# Altium PCB 408HR_pcbminions.PcbDoc
Units mil, origin at the board's own origin, x right, y up, seen from the top; angles counter-clockwise.
Board outline 3149.61 x 6299.21 mil, 4 copper layers (Top Layer, Layer 1, Layer 2, Bottom Layer), stack 63.779 mil thick; 23 components, 22 nets, 110 pads, 349 vias.
Unrouted connection lines stored in the file: 8.
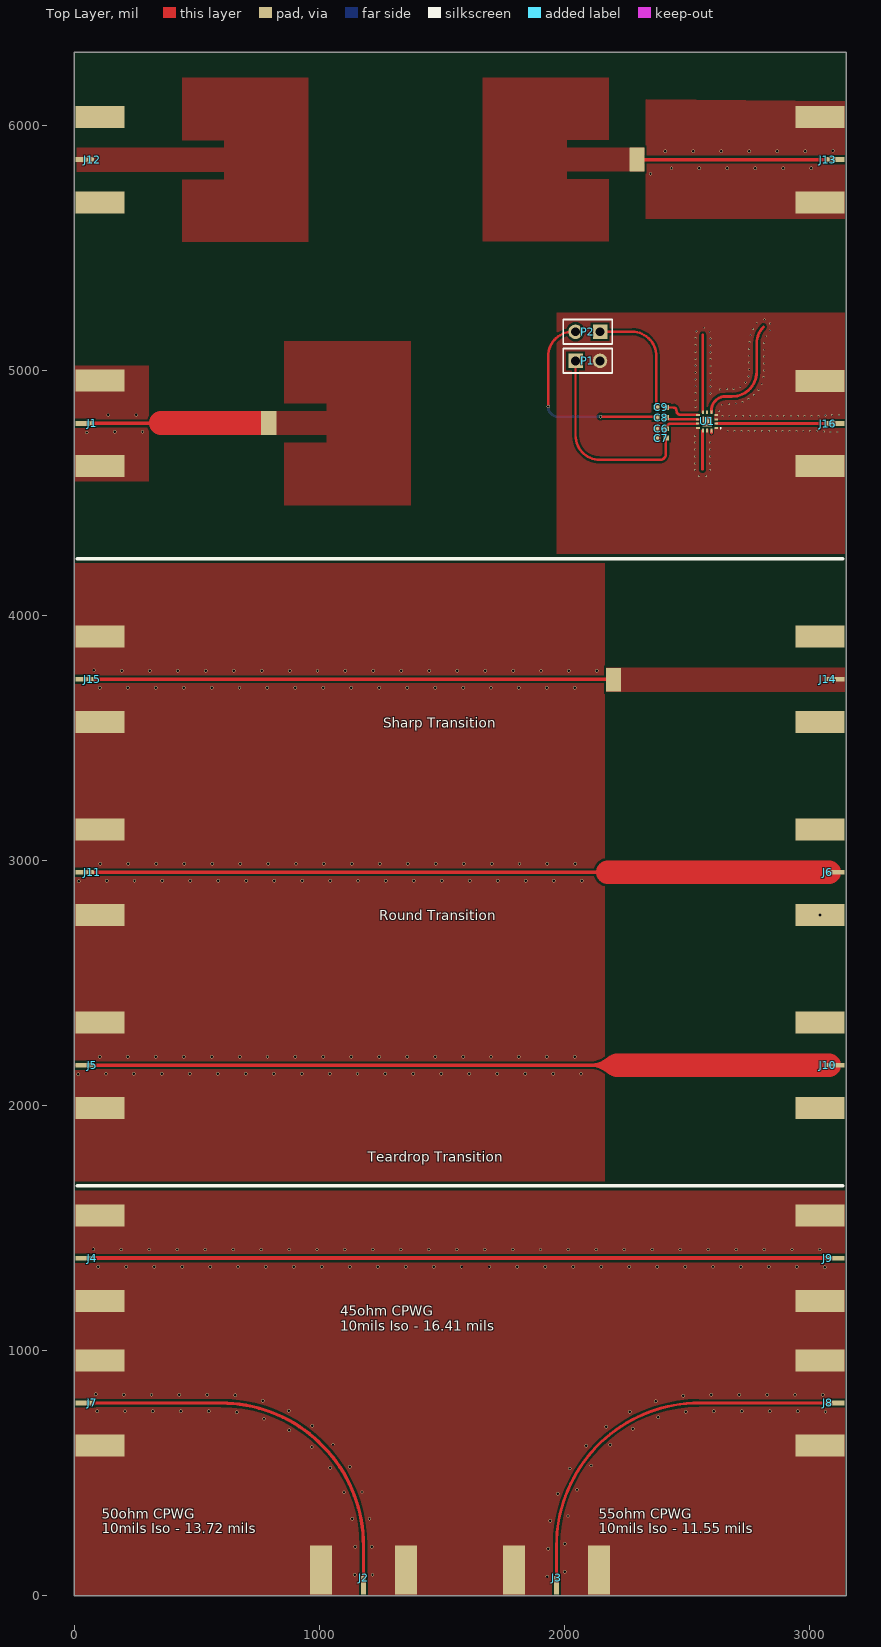
[diagram p0: Top Layer view]
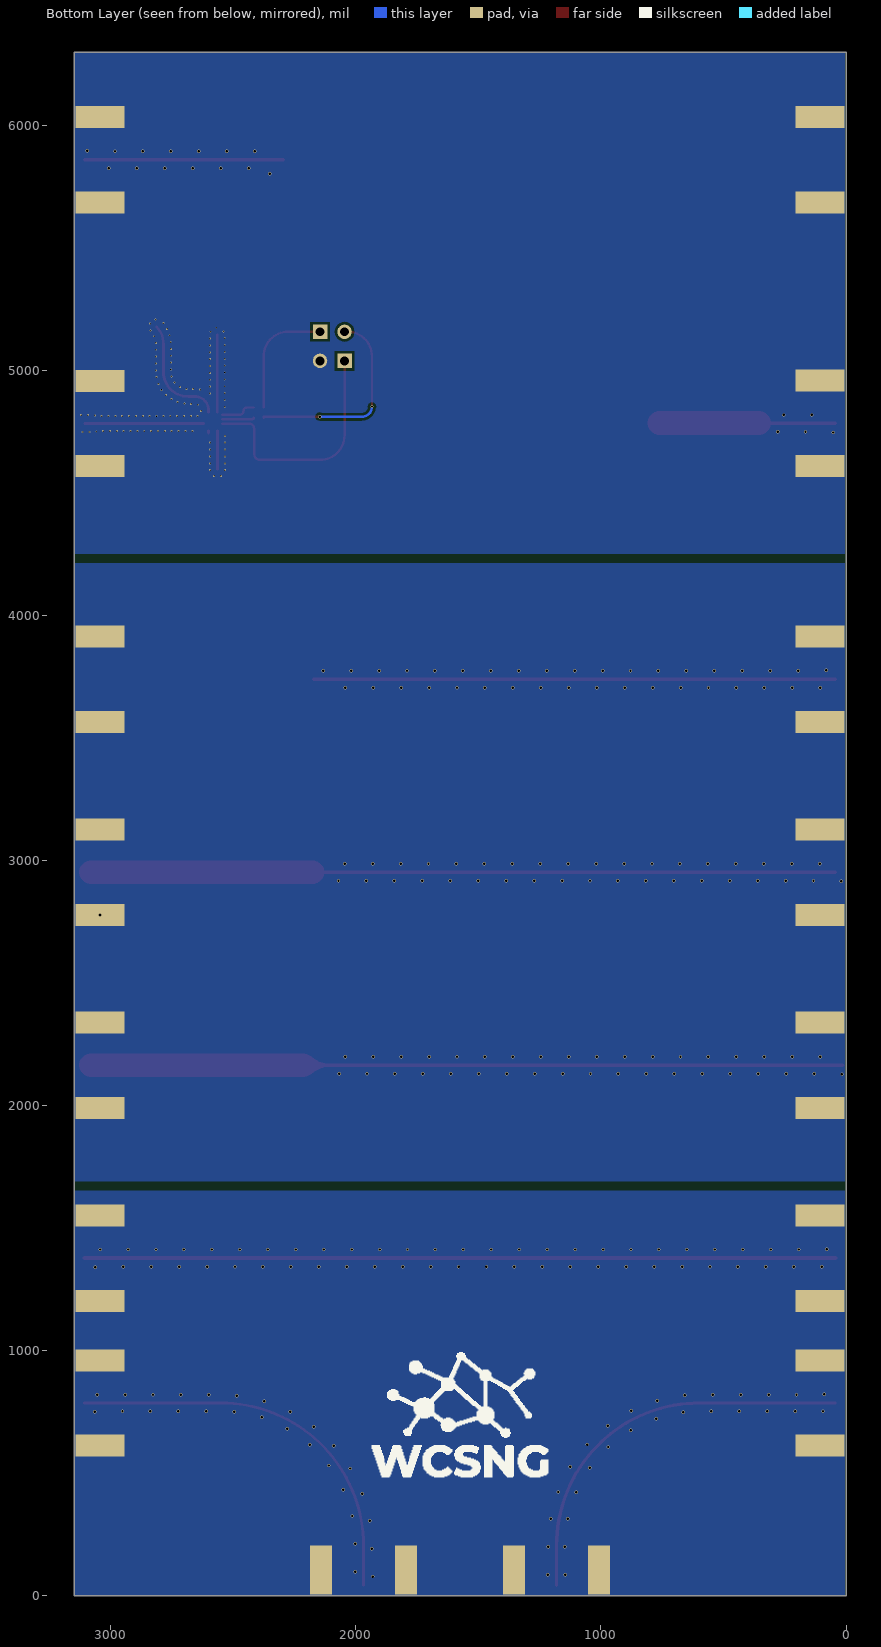
[diagram p1: Bottom Layer view, seen from below]
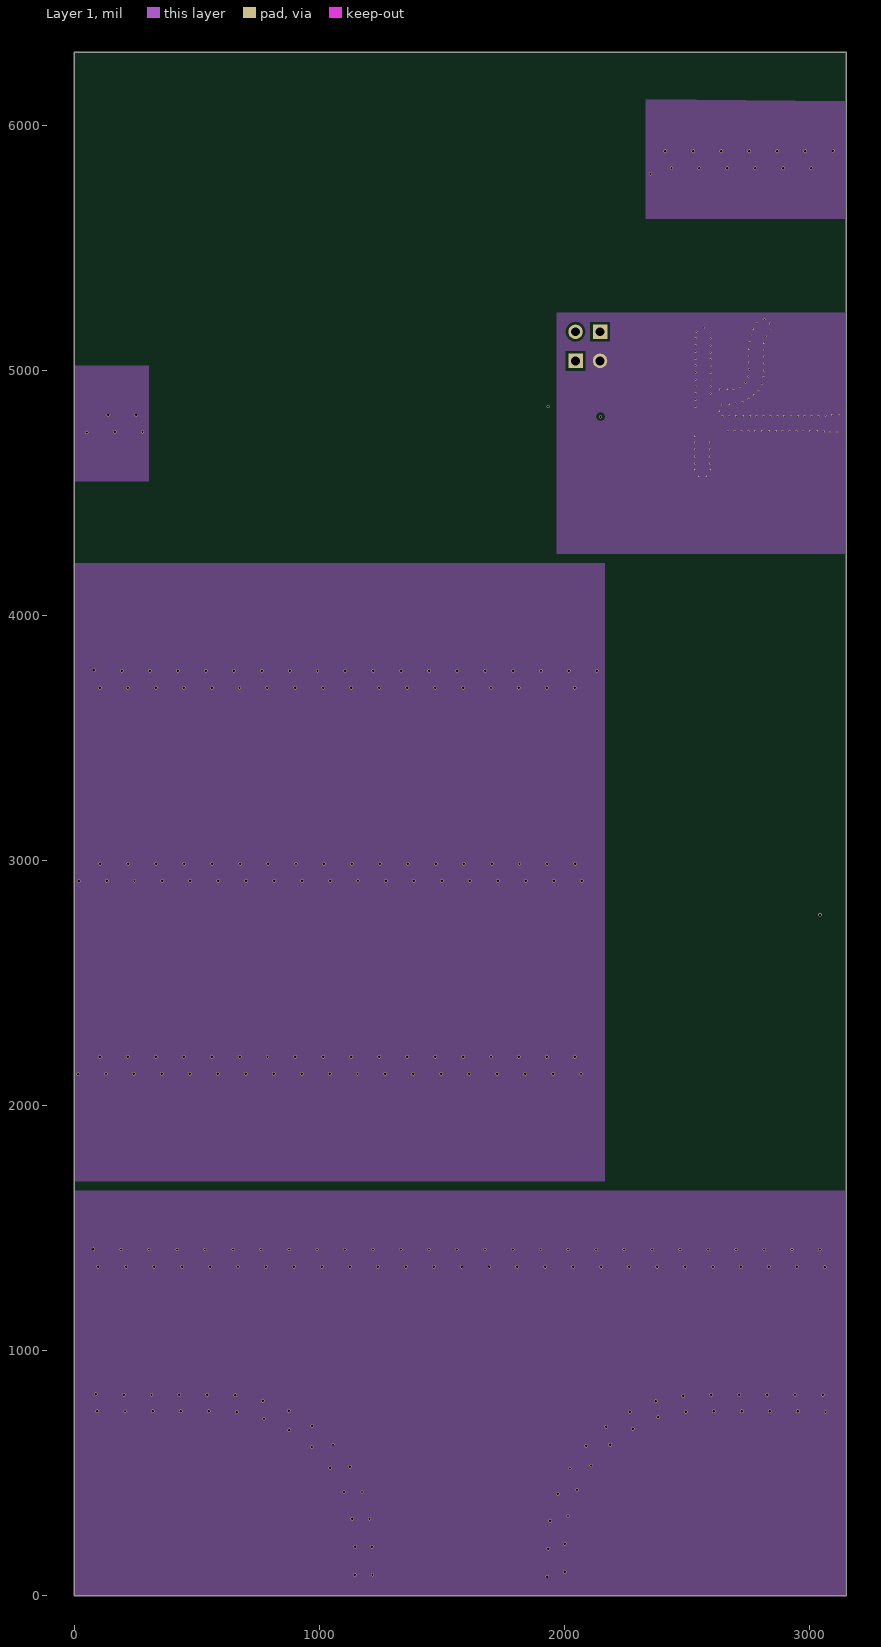
[diagram p2: Layer 1]
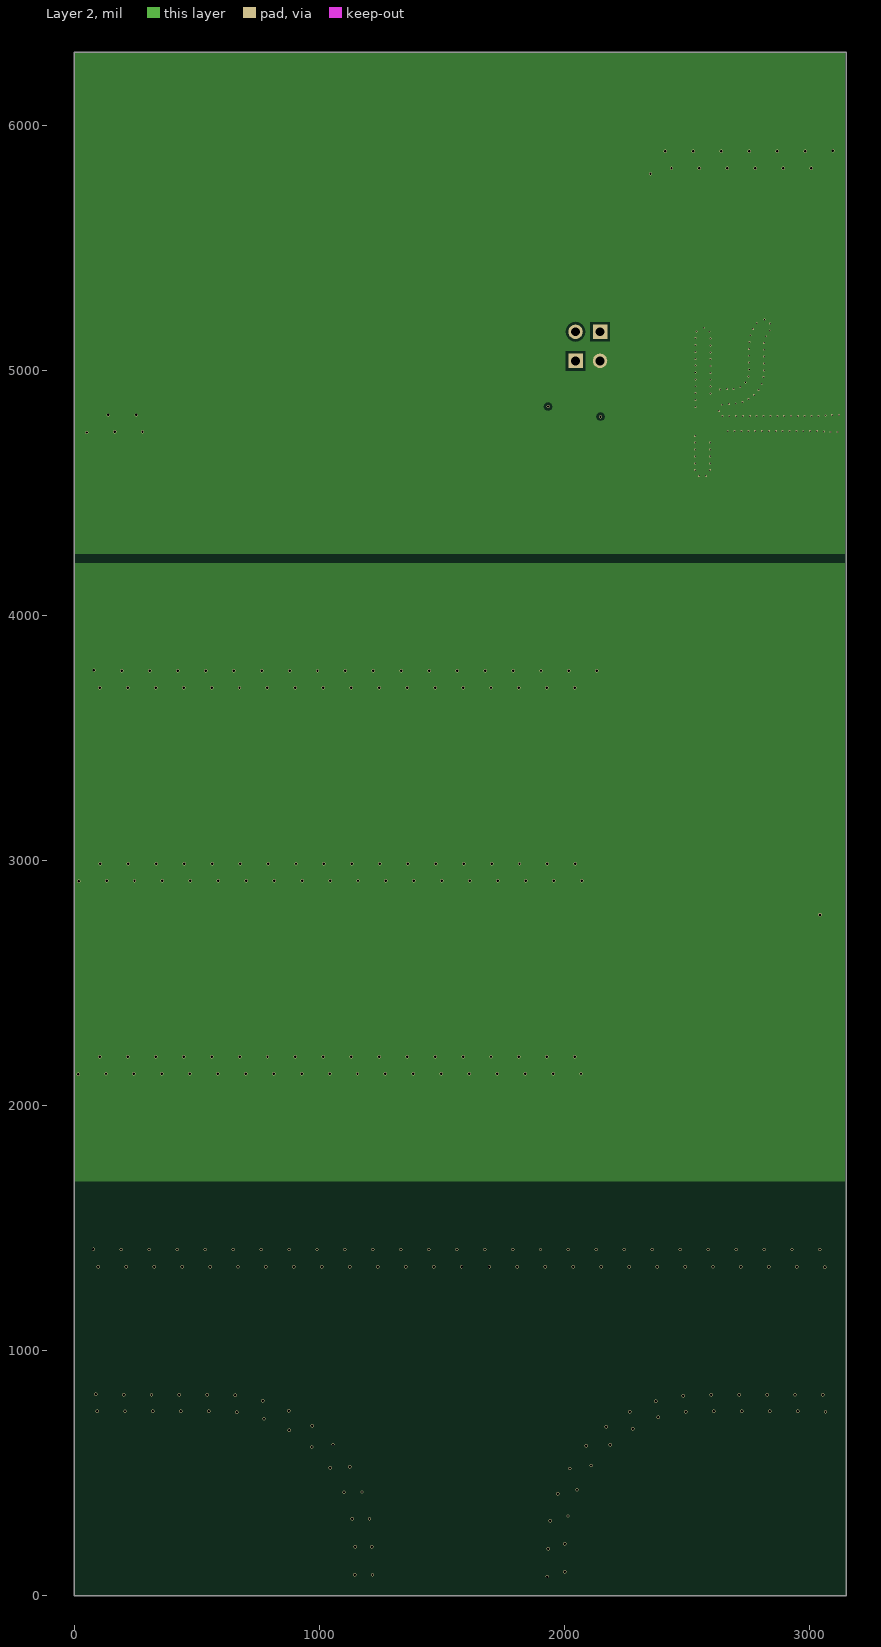
[diagram p3: Layer 2]

## Layer stack, top to bottom
Top Solder: solder mask 0.4, Solder Resist, Dk 3.5
Top Layer: signal copper 1.3778
Isola 408HR-1: prepreg 6.8898, FR4, Dk 3.64
Layer 1: signal copper 1.3778
Isola 408HR-Core: dielectric 44.4882, FR-4, Dk 3.64
Layer 2: signal copper 1.3778
Isola 408HR-2: prepreg 6.8898, FR4, Dk 3.64
Bottom Layer: signal copper 1.3778
Bottom Solder: solder mask 0.4, Solder Resist, Dk 3.5

## Board outline
0,0 3149.61,0 3149.61,6299.21 0,6299.21

## Design rules (kind name [scope] priority, off if disabled: settings)
BoardOutlineClearance [All] p1: gap=15 ignorepadtopadclearanceinfootprint=FALSE
Clearance "Clearance Polygons" [InPolygon] p1: gap=10 ignorepadtopadclearanceinfootprint=FALSE except(0: Arc-Hole Track-Hole SMDPad-Hole THPad-Hole Via-Hole Fill-Hole Poly-Hole Region-Hole Text-Hole)
Clearance "Schematic Clearance Constraint_14" [InNet('TRAN_rect')] p2: gap=10 ignorepadtopadclearanceinfootprint=FALSE except(0: Arc-SMDPad Track-SMDPad)
Clearance "Schematic Clearance Constraint_13" [InNet('TRAN_rect')] p3: gap=10 ignorepadtopadclearanceinfootprint=FALSE except(0: SMDPad-Fill SMDPad-Poly SMDPad-Region)
Clearance "Schematic Clearance Constraint_12" [InNet('Sig3')] p4: gap=10 ignorepadtopadclearanceinfootprint=FALSE
Clearance "Schematic Clearance Constraint_11" [InNet('Sig2')] p5: gap=10 ignorepadtopadclearanceinfootprint=FALSE except(0: Arc-Fill Arc-Poly Arc-Region Track-Fill Track-Poly Track-Region)
Clearance "Schematic Clearance Constraint_9" [InNet('Sig1')] p6: gap=10 ignorepadtopadclearanceinfootprint=FALSE
Clearance "Schematic Clearance Constraint_4" [InNet('TRAN_smooth')] p7: gap=10 ignorepadtopadclearanceinfootprint=FALSE
Clearance "Schematic Clearance Constraint_3" [InNet('CPWG45')] p8: gap=10 ignorepadtopadclearanceinfootprint=FALSE
Clearance "Schematic Clearance Constraint_2" [InNet('CPWG50')] p9: gap=10 ignorepadtopadclearanceinfootprint=FALSE
Clearance "Schematic Clearance Constraint_1" [InNet('CPWG55')] p10: gap=10 ignorepadtopadclearanceinfootprint=FALSE
Clearance "Schematic Clearance Constraint_6" [InNet('RF1')] p11: gap=2 ignorepadtopadclearanceinfootprint=FALSE except(5: Arc-Fill Arc-Poly Arc-Region Track-Fill Track-Poly Track-Region SMDPad-Fill SMDPad-Poly SMDPad-Region THPad-Fill THPad-Poly THPad-Region Via-Fill Via-Poly Via-Region Fill-Fill Fill-Poly Fill-Region Poly-Poly Poly-Region Region-Region)
Clearance [All] p12: gap=5 ignorepadtopadclearanceinfootprint=FALSE except(0: Arc-Hole Track-Hole SMDPad-Hole THPad-Hole Via-Hole Fill-Hole Poly-Hole Region-Hole Text-Hole)
ComponentClearance "HM-TRP & UFL" [InComponent('X1') vs InComponent('U1')] p1: gap=0 collisioncheckmode=3 verticalgap=0 showdistances=FALSE
ComponentClearance [All] p2: gap=1 collisioncheckmode=3 verticalgap=1 showdistances=FALSE
DiffPairsRouting [All] p1: maxlimit=393.7 minlimit=5 mostfreqgap=8 toplayer_minwidth=5 toplayer_maxwidth=15 toplayer_prefwidth=8 midlayer1_minwidth=5 midlayer1_maxwidth=15 midlayer1_prefwidth=8 midlayer2_minwidth=5 midlayer2_maxwidth=15 midlayer2_prefwidth=8 bottomlayer_minwidth=5 bottomlayer_maxwidth=15 bottomlayer_prefwidth=8 maxuncoupledlength=500
HoleSize [All] p1: absolutevalues=TRUE maxlimit=265 minlimit=10 maxpercent=80.000 minpercent=20.000
HoleToHoleClearance [All] p1: gap=10 allowstackedmicrovias=FALSE
MaxMinImpedance "Schematic Impedance Constraint_3" [InNet('CPWG55')] p1: minimum=55.00 maximum=55.00
MaxMinImpedance "Schematic Impedance Constraint_2" [InNet('CPWG50')] p2: minimum=50.00 maximum=50.00
MaxMinImpedance "Schematic Impedance Constraint_1" [InNet('CPWG45')] p3: minimum=45.00 maximum=45.00
MaxMinImpedance [InNetClass('All Nets')] p4: minimum=40.00 maximum=60.00
MinimumAnnularRing [All] p1: minimumring=4
MinimumSolderMaskSliver [All] p1: minsoldermaskwidth=0
PlaneClearance [All] p1: clearance=10
PlaneConnect [All] p1: planeconnectstyle=Relief reliefexpansion=4 reliefentries=4 reliefconductorwidth=6 reliefairgap=6
PolygonConnect "Via connect style" [isVia] p1: connectstyle=Direct reliefconductorwidth=10 reliefentries=4 polygonreliefangle="90 Angle" airgapwidth=10
PolygonConnect [All] p2: connectstyle=Relief reliefconductorwidth=10 reliefentries=4 polygonreliefangle="90 Angle" airgapwidth=6
RoutingCorners [All] p1: cornerstyle=45-Degree minsetback=49.21 maxsetback=49.21
RoutingVias [All] p1: holewidth=12 width=22 viastyle="Through Hole" minholewidth=10 minwidth=18 maxholewidth=100 maxwidth=114
SilkToSilkClearance [All] p1: silktosilkclearance=0
SilkToSolderMaskClearance [IsPad] p1: minsilkscreentomaskgap=5 clearancetoexposedcopper=TRUE
SolderMaskExpansion [All] p1: expansion=2.5 istentingtop=FALSE
Width GND [InNet('GND')] p1: maxlimit=30 minlimit=10 preferedwidth=20
Width Power [InNetClass('Power')] p2: maxlimit=40 minlimit=20 preferedwidth=30
Width 3V3 [InNetClass('3V3')] p3: maxlimit=30 minlimit=10 preferedwidth=20
Width "Schematic Width Constraint_23" [InNet('TRAN_sharp')] p4: maxlimit=97.14 minlimit=10 preferedwidth=13.72 toplayer_minwidth=13.72 midlayer1_maxwidth=10 midlayer1_prefwidth=10 midlayer2_maxwidth=10 midlayer2_prefwidth=10 bottomlayer_minwidth=13.72 minimp=50.000000 maximp=50.000000 favimp=50.000000
Width "Schematic Width Constraint_22" [InNet('TRAN_smooth')] p5: maxlimit=97.14 minlimit=10 preferedwidth=13.72 toplayer_minwidth=13.72 midlayer1_maxwidth=10 midlayer1_prefwidth=10 midlayer2_maxwidth=10 midlayer2_prefwidth=10 bottomlayer_minwidth=13.72 minimp=50.000000 maximp=50.000000 favimp=50.000000
Width "Schematic Width Constraint_21" [InNet('Sig2')] p6: maxlimit=97.14 minlimit=10 preferedwidth=13.72 toplayer_minwidth=13.72 midlayer1_maxwidth=10 midlayer1_prefwidth=10 midlayer2_maxwidth=10 midlayer2_prefwidth=10 bottomlayer_minwidth=13.72 minimp=50.000000 maximp=50.000000 favimp=50.000000
Width "Schematic Width Constraint_20" [InNet('Sig1')] p7: maxlimit=97.14 minlimit=10 preferedwidth=13.72 toplayer_minwidth=13.72 midlayer1_maxwidth=10 midlayer1_prefwidth=10 midlayer2_maxwidth=10 midlayer2_prefwidth=10 bottomlayer_minwidth=13.72 minimp=50.000000 maximp=50.000000 favimp=50.000000
Width "Schematic Width Constraint_19" [InNet('Sig3')] p8: maxlimit=97.14 minlimit=10 preferedwidth=13.72 toplayer_minwidth=13.72 midlayer1_maxwidth=10 midlayer1_prefwidth=10 midlayer2_maxwidth=10 midlayer2_prefwidth=10 bottomlayer_minwidth=13.72 minimp=50.000000 maximp=50.000000 favimp=50.000000
Width "Schematic Width Constraint_18" [InNet('TRAN_rect')] p9: maxlimit=97.14 minlimit=10 preferedwidth=13.72 toplayer_minwidth=13.72 midlayer1_maxwidth=10 midlayer1_prefwidth=10 midlayer2_maxwidth=10 midlayer2_prefwidth=10 bottomlayer_minwidth=13.72 minimp=50.000000 maximp=50.000000 favimp=50.000000
Width "Schematic Width Constraint_17" [InNet('RF2')] p10: maxlimit=11.28 minlimit=10 preferedwidth=11.28 toplayer_minwidth=11.28 midlayer1_maxwidth=10 midlayer1_prefwidth=10 midlayer2_maxwidth=10 midlayer2_prefwidth=10 bottomlayer_minwidth=11.28 minimp=50.000000 maximp=50.000000 favimp=50.000000
Width "Schematic Width Constraint_16" [InNet('RF3')] p11: maxlimit=11.28 minlimit=10 preferedwidth=11.28 toplayer_minwidth=11.28 midlayer1_maxwidth=10 midlayer1_prefwidth=10 midlayer2_maxwidth=10 midlayer2_prefwidth=10 bottomlayer_minwidth=11.28 minimp=50.000000 maximp=50.000000 favimp=50.000000
Width "Schematic Width Constraint_11" [InNet('RF4')] p12: maxlimit=11.28 minlimit=10 preferedwidth=11.28 toplayer_minwidth=11.28 midlayer1_maxwidth=10 midlayer1_prefwidth=10 midlayer2_maxwidth=10 midlayer2_prefwidth=10 bottomlayer_minwidth=11.28 minimp=50.000000 maximp=50.000000 favimp=50.000000
Width "Schematic Width Constraint_3" [InNet('RFC')] p13: maxlimit=11.28 minlimit=10 preferedwidth=11.28 toplayer_minwidth=11.28 midlayer1_maxwidth=10 midlayer1_prefwidth=10 midlayer2_maxwidth=10 midlayer2_prefwidth=10 bottomlayer_minwidth=11.28 minimp=50.000000 maximp=50.000000 favimp=50.000000
Width "Schematic Width Constraint_10" [InNet('TRAN_smooth')] p14: maxlimit=13.72 minlimit=13.72 preferedwidth=13.72
Width "Schematic Width Constraint_4" [InNet('CPWG45')] p15: maxlimit=16.41 minlimit=16.41 preferedwidth=16.41
Width "Schematic Width Constraint_2" [InNet('CPWG50')] p16: maxlimit=13.72 minlimit=13.72 preferedwidth=13.72
Width "Schematic Width Constraint_1" [InNet('CPWG55')] p17: maxlimit=11.55 minlimit=11.55 preferedwidth=11.55
Width "Schematic Width Constraint_6" [InNet('RF1')] p18: maxlimit=11.28 minlimit=10 preferedwidth=11.28 toplayer_minwidth=11.28 midlayer1_maxwidth=10 midlayer1_prefwidth=10 midlayer2_maxwidth=10 midlayer2_prefwidth=10 bottomlayer_minwidth=11.28 minimp=50.000000 maximp=50.000000 favimp=50.000000
Width [All] p19: maxlimit=400 minlimit=6 preferedwidth=8
20 further rules are at their usual default settings.

## Classes and differential pairs
component class 408HR_pcbminions: J1 J2 J3 J4 J5 J6 J7 J8 J9 J10 J11 J12 J13 J14 J15 J16 P1
component class U_RF_switch_ckt: C6 C7 C8 C9 P2 U1

## Components (designator, comment, footprint, x,y, rotation, side; value= is the part's Value field where it differs from the comment)
C6 "Cap Semi" 0402 2395,4762 r0 top value=100pF
C7 "Cap Semi" 0402 2395,4724 r0 top value=100pF
C8 "Cap Semi" 0402 2396,4808 r0 top value=100pF
C9 "Cap Semi" 0402 2396,4849 r0 top value=100pF
J1 "SMA 50 Ohm edge" "SMA-OSHPARK-4L-1.6MM- ALT3" 5,4784.25 r0 top
J2 "SMA 50 Ohm edge" "SMA-OSHPARK-4L-1.6MM- ALT3" 1181.1,5 r90 top
J3 "SMA 50 Ohm edge" "SMA-OSHPARK-4L-1.6MM- ALT3" 1968.5,5 r90 top
J4 "SMA 50 Ohm edge" "SMA-OSHPARK-4L-1.6MM- ALT3" 5,1377.95 r0 top
J5 "SMA 50 Ohm edge" "SMA-OSHPARK-4L-1.6MM- ALT3" 5,2165.35 r0 top
J6 "SMA 50 Ohm edge" "SMA-OSHPARK-4L-1.6MM- ALT3" 3144.61,2952.76 r180 top
J7 "SMA 50 Ohm edge" "SMA-OSHPARK-4L-1.6MM- ALT3" 5,787.4 r0 top
J8 "SMA 50 Ohm edge" "SMA-OSHPARK-4L-1.6MM- ALT3" 3144.61,787.4 r180 top
J9 "SMA 50 Ohm edge" "SMA-OSHPARK-4L-1.6MM- ALT3" 3144.61,1377.95 r180 top
J10 "SMA 50 Ohm edge" "SMA-OSHPARK-4L-1.6MM- ALT3" 3144.61,2165.35 r180 top
J11 "SMA 50 Ohm edge" "SMA-OSHPARK-4L-1.6MM- ALT3" 5,2952.76 r0 top
J12 "SMA 50 Ohm edge" "SMA-OSHPARK-4L-1.6MM- ALT3" 5,5860.15 r0 top
J13 "SMA 50 Ohm edge" "SMA-OSHPARK-4L-1.6MM- ALT3" 3144.61,5860.16 r180 top
J14 "SMA 50 Ohm edge" "SMA-OSHPARK-4L-1.6MM- ALT3" 3144.61,3740.16 r180 top
J15 "SMA 50 Ohm edge" "SMA-OSHPARK-4L-1.6MM- ALT3" 5,3740.16 r0 top
J16 "SMA 50 Ohm edge" "SMA-OSHPARK-4L-1.6MM- ALT3" 3144.61,4783.46 r180 top
P1 "Header 2" HDR1X2 2046,5039 r0 top
P2 "Header 2" HDR1X2 2146,5158 r180 top
U1 "SKY13575-639LF" *QFN45P200X200X55-15N 2583,4792 r180 top

## Footprints (in the part's own frame and the unit in brackets; to place one, negate y for a bottom-side part, rotate by r counter-clockwise, add the part's x,y. Pads: shape width x height; smd on the part's side, far side on the other; paste and mask are expansions set on the pad)
0402 [mm] "Chip Capacitor, Body 1.0x0.5mm, IPC High Density"
  rect 0.6x0.5 smd: 1(-0.5,0) 2(0.5,0)
  body extent -0.55,-0.3 0.55,0.3, height 1.3
*QFN45P200X200X55-15N [mm]
  rect 0.395x0.2 smd: 1(-0.953,0.675) 2(-0.953,0.225) 3(-0.953,-0.225) 4(-0.953,-0.675) 8(0.953,-0.675) 9(0.953,-0.225) 10(0.953,0.225) 11(0.953,0.675)
  rect 0.2x0.395 smd: 5(-0.45,-0.953) 6(0,-0.953) 7(0.45,-0.953) 12(0.45,0.953) 13(0,0.953) 14(-0.45,0.953)
  rect 1x1 smd: 15(0,0)
  silkscreen extent -1.45,0.64 -1.35,0.74
HDR1X2 [mm] "Connector; Header; 2 Position"
  rect 1.5x1.5 hole 0.9: 1(0,0)
  round 1.5 hole 0.9: 2(2.54,0)
  silkscreen extent -1.27,-1.27 3.81,1.27
"SMA-OSHPARK-4L-1.6MM- ALT3" [mil] "Short and thin signal pin"
  rect 200x90 smd: GND(101,-174) GND(101,174)
  rect 200x90 smd far side: GND(101,-174) GND(101,174)
  rect 75x20 smd: SIG(38.5,0)

## Part data
C6 C7 C8 C9: "Capacitor (Semiconductor SIM Model)", LatestRevisionDate=29-May-2009, LatestRevisionNote="IPC-7351 Footprint Added.", PackageDescription="Chip Capacitor", PackageReference=C1206, Published=8-Jun-2000, Publisher="Altium Limited"
J1 J2 J3 J4 J5 J6 J7 J8 J9 J10 J11 J12 J13 J14 J15 J16: library part SMA-OSHPARK-4L-1.6MM-ALT3, Package=SMA-OSHPARK-4L-1.6MM, Supplier Part Number 1=J658-ND, DeviceName=-OSHPARK-4L-1.6MM, DeviceSetName=SMA, GateName_1=G1, LibraryName=dword1511-connectors, Supplier 1=Digi-Key, SymbolName_1=COAX
P1 P2: "Header, 2-Pin", LatestRevisionDate=17-Jul-2002, LatestRevisionNote="Re-released for DXP Platform.", Publisher="Altium Limited"

## Free pads (board coordinates)
  rect 62.99x97.14 smd paste+0 mask+0: 2(795,4785.32)
  rect 60x97.14 smd paste+0 mask+0: 2(2201,3738) 2(2296.8,5860.83)

## Via types
v1: diameter 14, hole 10, Top Layer to Bottom Layer, 244 vias
v2: diameter 8, hole 6, Top Layer to Bottom Layer, 104 vias
v3: diameter 15, hole 12, Top Layer to Bottom Layer, 1 vias

## Nets (pads, with @x,y where several pads share a name; then routed paths per layer and width w, separated by ;. In a path a pad name is that pad's centre, name@x,y a point inside that pad or via, vN(x,y) a via of type N, cw(c..) or ccw(c..) an arc to the next point about the centre after c; other vN are vias at no path point)
3V3: C6.2 C7.2 P1.1 U1.10 | length 1009.1
  Top Layer w10: P1.1@2046,5059 2046,4735 ccw(c2146,4735) 2146,4635 2390,4635 ccw(c2390,4659.69) 2414.69,4659.69 C7.2 C6.2 cw(c2435.83,4762) 2435.83,4783.14 U1.10
CPWG45: J4.SIG J9.SIG | length 3062.6
  Top Layer w16.41: J4.SIG J9.SIG
CPWG50: J2.SIG J7.SIG | length 1631.4
  Top Layer w13.72: J7.SIG 598.28,787.4 cw(c598.28,204.58) 1181.1,204.58 J2.SIG
CPWG55: J3.SIG J8.SIG | length 1634.5
  Top Layer w11.55: J3.SIG 1968.5,204.88 cw(c2551.02,204.88) 2551.02,787.4 J8.SIG@3109.1,787.4
GND: C6.1 C7.1 J1.GND J12.GND J13.GND J16.GND P1.2 U1.1 U1.3 U1.4 U1.6 U1.11 U1.13
  other v1: 51.37,4747.02 165.33,4750.02 279.33,4750.02 140.19,4818.48 254.19,4818.48 2352,5802 2437.64,5825.93 2551.64,5825.93 2665.64,5825.93 2779.64,5825.93 2893.64,5825.93 3007.64,5825.93 2412.5,5894.38 2526.5,5894.38 2640.5,5894.38 2754.5,5894.38 2868.5,5894.38 2982.5,5894.38 3096.46,5897.39
  other v2: 2550.26,4570.3 2578.26,4570.27 2534.42,4593.39 2594.13,4593.34 2533.71,4621.38 2594.86,4621.33 2533.71,4649.38 2594.86,4649.33 2533.71,4677.38 2594.86,4677.33 2533.71,4705.38 2594.86,4705.33 2533.71,4733.38 3087.02,4748.99 3115.02,4748.99 3059.09,4750.96 2667.16,4752.89 2695.16,4752.89 2723.16,4752.89 2751.16,4752.89 2779.16,4752.89 2807.16,4752.89 2835.16,4752.89 2863.16,4752.89 2891.16,4752.89 2919.16,4752.89 2947.16,4752.89 2975.16,4752.89 3003.16,4752.89 3031.16,4752.89 2645.22,4814.04 2673.22,4814.04 2701.22,4814.04 2729.22,4814.04 2757.22,4814.04 2785.22,4814.04 2813.22,4814.04 2841.22,4814.04 2869.22,4814.04 2897.22,4814.04 2925.22,4814.04 2953.22,4814.04 2981.22,4814.04 3009.22,4814.04 3037.22,4814.04 3065.04,4817.22 3093.03,4817.93 3121.03,4817.93 2631.29,4835.23 2534.71,4851.73 2644.07,4860.15 2671.87,4863.42 2699.85,4864.65 2727.2,4870.65 2534.71,4879.73 2752.45,4882.74 2774.81,4899.6 2595.86,4906.26 2534.71,4907.73 2635.57,4921.5 2792.86,4921 2663.4,4924.58 2691.4,4924.91 2718.19,4933.06 2595.86,4934.26 2534.71,4935.73 2805.86,4945.8 2739.58,4951.13 2595.86,4962.26 2534.71,4963.73 2813.5,4972.74 2752.1,4976.17 2595.86,4990.26 2534.71,4991.73 2815.58,5000.66 2754.42,5004.08 2595.86,5018.26 2534.71,5019.73 2815.58,5028.66 2754.42,5032.08 2595.86,5046.26 2534.71,5047.73 2815.58,5056.66 2754.42,5060.08 2595.86,5074.26 2534.71,5075.73 2815.58,5084.66 2754.42,5088.08 2595.86,5102.26 2534.71,5103.73 2815.64,5112.66 2755.04,5116.07 2595.86,5130.26 2534.71,5131.73 2822.75,5139.74 2759.52,5143.71 2592.3,5158.04 2539.11,5159.38 2838.5,5162.89 2769.68,5169.8 2569.52,5174.31 2839.65,5190.87 2785.53,5192.88 2817.12,5207.48
GND_TRAN: J5.GND J6.GND J10.GND J11.GND J14.GND J15.GND
  other v1: 16.44,2128.12 130.4,2131.13 244.4,2131.13 358.4,2131.13 472.4,2131.13 586.4,2131.13 700.4,2131.13 814.4,2131.13 928.4,2131.13 1042.4,2131.13 1156.4,2131.13 1270.4,2131.13 1384.4,2131.13 1498.4,2131.13 1612.4,2131.13 1726.4,2131.13 1840.4,2131.13 1954.4,2131.13 2068.4,2131.13 105.26,2199.58 219.26,2199.58 333.26,2199.58 447.26,2199.58 561.26,2199.58 675.26,2199.58 789.26,2199.58 903.26,2199.58 1017.26,2199.58 1131.26,2199.58 1245.26,2199.58 1359.26,2199.58 1473.26,2199.58 1587.26,2199.58 1701.26,2199.58 1815.26,2199.58 1929.26,2199.58 2043.26,2199.58 18.63,2915.52 132.59,2918.53 246.59,2918.53 360.59,2918.53 474.59,2918.53 588.59,2918.53 702.59,2918.53 816.59,2918.53 930.59,2918.53 1044.59,2918.53 1158.59,2918.53 1272.59,2918.53 1386.59,2918.53 1500.59,2918.53 1614.59,2918.53 1728.59,2918.53 1842.59,2918.53 1956.59,2918.53 2070.59,2918.53 107.45,2986.98 221.45,2986.98 335.45,2986.98 449.45,2986.98 563.45,2986.98 677.45,2986.98 791.45,2986.98 905.45,2986.98 1019.45,2986.98 1133.45,2986.98 1247.45,2986.98 1361.45,2986.98 1475.45,2986.98 1589.45,2986.98 1703.45,2986.98 1817.45,2986.98 1931.45,2986.98 2045.45,2986.98 105.09,3705.93 219.09,3705.93 333.09,3705.93 447.09,3705.93 561.09,3705.93 675.09,3705.93 789.09,3705.93 903.09,3705.93 1017.09,3705.93 1131.09,3705.93 1245.09,3705.93 1359.09,3705.93 1473.09,3705.93 1587.09,3705.93 1701.09,3705.93 1815.09,3705.93 1929.09,3705.93 2043.09,3705.93 195.19,3774.39 309.19,3774.39 423.19,3774.39 537.19,3774.39 651.19,3774.39 765.19,3774.39 879.19,3774.39 993.19,3774.39 1107.19,3774.39 1221.19,3774.39 1335.19,3774.39 1449.19,3774.39 1563.19,3774.39 1677.19,3774.39 1791.19,3774.39 1905.19,3774.39 2019.19,3774.39 2133.19,3774.39 81.23,3777.36
  other v3: 3043.61,2778.76
GNDCPWG: J2.GND J3.GND J4.GND J7.GND J8.GND J9.GND
  other v1: 1931.27,79.2 1144.63,86.78 1217.58,86.77 2001.99,98.91 1935.02,193.14 1146.88,200.76 1215.33,200.75 2001.9,212.91 1943.71,306.81 1135.45,314.18 1205.45,314.32 2015.37,326.11 1973.18,416.93 1101.29,422.95 1174.84,424.13 2052.12,434.03 2021.99,519.95 1045.35,522.28 1124.92,526.62 2110,532.24 969.84,607.69 2089.18,612.05 2187.15,616.17 1056.45,617.77 878.55,675.96 2279.98,682.33 2172.28,690.1 972.62,695.03 775.04,723.72 2384.31,728.29 663.85,748.87 2495.98,751.21 3065.91,750.92 2268.07,751.9 93.93,753.17 207.93,753.17 321.93,753.17 435.93,753.17 549.93,753.17 2609.95,753.92 2723.95,753.92 2837.95,753.92 2951.95,753.92 876.16,755.79 2373.83,794.45 769.93,797.15 2485.59,816.96 657.99,818.73 2599.52,820.89 2713.52,820.89 2827.52,820.89 2941.52,820.89 3055.52,820.89 202.03,821.63 316.03,821.63 430.03,821.63 544.03,821.63 88.05,823.71 3062.92,1341.47 98.92,1342.35 212.92,1342.35 326.92,1342.35 440.92,1342.35 554.92,1342.35 668.92,1342.35 782.92,1342.35 896.92,1342.35 1010.92,1342.35 1124.92,1342.35 1238.92,1342.35 1352.92,1342.35 1466.92,1342.35 1580.92,1342.35 1694.92,1342.35 1808.92,1342.35 1922.92,1342.35 2036.92,1342.35 2150.92,1342.35 2264.92,1342.35 2378.92,1342.35 2492.92,1342.35 2606.92,1342.35 2720.92,1342.35 2834.92,1342.35 2948.92,1342.35 193.2,1413.55 307.2,1413.55 421.2,1413.55 535.2,1413.55 649.2,1413.55 763.2,1413.55 877.2,1413.55 991.2,1413.55 1105.2,1413.55 1219.2,1413.55 1333.2,1413.55 1447.2,1413.55 1561.2,1413.55 1675.2,1413.55 1789.2,1413.55 1903.2,1413.55 2017.2,1413.55 2131.2,1413.55 2245.2,1413.55 2359.2,1413.55 2473.2,1413.55 2587.2,1413.55 2701.2,1413.55 2815.2,1413.55 2929.2,1413.55 3043.2,1413.55 79.22,1415.19
NetC8_1: C8.1 P2.2 | length 843.2
  Top Layer w10: v1(1934,4853) 1934,5058 cw(c2034,5058) 2034,5158 P2.2 ; v1(2148,4812) 2372.32,4812 cw(c2372.32,4808) C8.1
  Bottom Layer w10: v1(1934,4853) ccw(c1976,4853) 1976,4811 2147,4811 ccw(c2147,4812) v1(2148,4812)
NetC9_1: C9.1 P2.1 | length 496.4
  Top Layer w10: P2.1 2276.32,5158 cw(c2276.32,5058) 2376.32,5058 C9.1
RF1: U1.14 | length 9.5
  Top Layer w11.28: 2600.72,4745 U1.14
RF2: U1.12 | length 157.5
  Top Layer w11.28: 2564.28,4597 U1.12@2564.28,4754.54
RF3: U1.7 | length 315.1
  Top Layer w11.28: U1.7 2565.28,5144.58
RF4: U1.5 | length 472.6
  Top Layer w11.28: U1.5 2600.72,4837.72 cw(c2657,4837.72) 2657,4894 2685,4894 ccw(c2685,4994) 2785,4994 2785,5109 cw(c2885,5109) 2812.46,5177.83
RFC: J16.SIG U1.2 | length 485.9
  Top Layer w11.28: U1.2 2620.5,4783.46 J16.SIG
Sig1: J1.SIG pad.2@795,4785.32 | length 718.1
  Top Layer w13.72: J1.SIG@43.34,4784.25 354.25,4784.25 ccw(c354.25,4785) 355,4785
  Top Layer w97.14: 355,4785.32 761,4785.32
Sig2: J12.SIG
Sig3: J13.SIG pad.2@2296.8,5860.83 | length 810.1
  Top Layer w13.72: pad.2@2296,5860.16 2296.8,5860.16 J13.SIG
TRAN_rect: J14.SIG J15.SIG pad.2@2201,3738 | length 2129.2
  Top Layer w13.72: J15.SIG pad.2@2172.71,3740.16
TRAN_sharp: J6.SIG J11.SIG | length 3016.5
  Top Layer w13.72: J11.SIG 2156.5,2952.76
  Top Layer w97.14: 2177.17,2952.76 J6.SIG@3080.71,2952.76
TRAN_smooth: J5.SIG J10.SIG | length 3067.7
  Top Layer w13.72: J5.SIG@13,2165.35 J5.SIG 2215.55,2165.35
  Top Layer w97.14: 2215.55,2165.35 J10.SIG@3080.71,2165.35
VC1: C9.2 U1.8 | length 147.4
  Top Layer w10: C9.2 2445,4849 cw(c2445,4836) 2458,4836 ccw(c2475,4836) 2475,4819 2478,4819 2478,4818.57 U1.8
VC2: C8.2 U1.9 | length 133.9
  Top Layer w10: C8.2 ccw(c2422.83,4808) 2422.83,4800.86 U1.9
pads on no net: U1.15

## Polygon pours and split planes (outlines as drawn)
GND on Top Layer "RFS-1" (solid, pour order 53): 1968.5,5236.22 3149.61,5236.22 3149.61,4251.97 1968.5,4251.97
GND on Top Layer "GND-Sig1-L1" (solid, pour order 51): 0,5019.69 305.12,5019.69 305.12,4547.24 0,4547.24
GND on Top Layer "GND-Sig3" (solid, pour order 45): 2332.68,6107.46 2332.68,5620.08 3149.61,5620.08 3149.61,6097.62
GND_TRAN on Top Layer "GND-TRAN1" (solid, pour order 5): 0,4212.6 2165.35,4212.6 2165.35,1692.91 0,1692.91
GNDCPWG on Top Layer "GND-CPWG-1" (solid, pour order 0): 0,1653.54 3149.61,1653.54 3149.61,0 0,0
Sig3 on Top Layer "Bottom-PatchAnt" (solid, pour order 27): 1666.87,6195.07 1666.87,5526.6 2181.57,5526.6 2181.57,5780 2010,5780 2010,5812.33 2326.57,5812.33 2326.57,5909.33 2010,5909.33 2010,5941.67 2181.57,5941.67 2181.57,6195.07
Sig2 on Top Layer "Bottom-PatchAnt" (solid, pour order 41): 956.11,5525.15 956.11,6193.62 441.41,6193.62 441.41,5940.22 612.98,5940.22 612.98,5907.89 11.11,5907.89 11.11,5810.89 612.98,5810.89 612.98,5778.55 441.41,5778.55 441.41,5525.15
Sig1 on Top Layer "Bottom-PatchAnt" (solid, pour order 37): 1373.13,4451.1 1373.13,5119.57 858.43,5119.57 858.43,4866.17 1030,4866.17 1030,4833.83 713.43,4833.83 713.43,4736.83 1030,4736.83 1030,4704.5 858.43,4704.5 858.43,4451.1
TRAN_rect on Top Layer "TRANrect" (solid, pour order 34): 2163.29,3786.84 2163.29,3689.7 3148.29,3689.7 3148.29,3786.84
GND on Layer 1 "RFS-1" (solid, pour order 55): 1968.5,5236.22 3149.61,5236.22 3149.61,4251.97 1968.5,4251.97
GND on Layer 1 "GND-Sig1-L2" (solid, pour order 49): 0,5019.69 305.12,5019.69 305.12,4547.24 0,4547.24
GND on Layer 1 "GND-Sig3-L2" (solid, pour order 47): 2332.68,6107.46 2332.68,5620.08 3149.61,5620.08 3149.61,6097.62
GNDCPWG on Layer 1 "GND-CPWG-2" (solid, pour order 2): 0,1653.54 3149.61,1653.54 3149.61,0 0,0
GND_TRAN on Layer 1 "GND-TRAN2" (solid, pour order 6): 0,4212.6 2165.35,4212.6 2165.35,1692.91 0,1692.91
GND on Layer 2 "GND3-Bottom" (solid, pour order 32): 0,6299.21 3149.61,6299.21 3149.61,4251.97 0,4251.97
GND_TRAN on Layer 2 "GND-TRAN3" (solid, pour order 7): 0,4212.6 3149.61,4212.6 3149.61,1692.91 0,1692.91
GND on Bottom Layer "GND3-Bottom" (solid, pour order 35): 0,6299.21 3149.61,6299.21 3149.61,4251.97 0,4251.97
GNDCPWG on Bottom Layer "GND-CPWG-4" (solid, pour order 9): 0,1653.54 3149.61,1653.54 3149.61,0 0,0
GND_TRAN on Bottom Layer "GND-TRAN4" (solid, pour order 8): 0,4212.6 3149.61,4212.6 3149.61,1692.91 0,1692.91
no net on Top Solder "Bottom-PatchAnt" (solid, pour order 43): 1666.87,6195.07 1666.87,5526.6 2181.57,5526.6 2181.57,5780 2010,5780 2010,5812.33 2326.57,5812.33 2326.57,5909.33 2010,5909.33 2010,5941.67 2181.57,5941.67 2181.57,6195.07
Sig2 on Top Solder "Bottom-PatchAnt" (solid, pour order 25): 956.11,5525.15 956.11,6193.62 441.41,6193.62 441.41,5940.22 612.98,5940.22 612.98,5907.89 11.11,5907.89 11.11,5810.89 612.98,5810.89 612.98,5778.55 441.41,5778.55 441.41,5525.15
Sig1 on Top Solder "Bottom-PatchAnt" (solid, pour order 23): 1373.13,4451.1 1373.13,5119.57 858.43,5119.57 858.43,4866.17 1030,4866.17 1030,4833.83 713.43,4833.83 713.43,4736.83 1030,4736.83 1030,4704.5 858.43,4704.5 858.43,4451.1
no net on Top Solder "TRANrect" (solid, pour order 19): 2172.71,3786.84 2172.71,3689.7 3148.29,3689.7 3148.29,3786.84

## Silkscreen, mask and mechanical layers (free items; w line width, h text height)
Top Overlay:
  lines w13.19: 11.81,1673.23 3137.8,1673.23 ; 11.81,4232.28 3137.8,4232.28
  text "Sharp Transition" at 1261.57,3543.31 h40
  text "Round Transition" at 1244.9,2755.91 h40
  text "Teardrop Transition" at 1198.82,1771.65 h40
  text "45ohm CPWG / 10mils Iso - 16.41 mils" at 1085.51,1082.68 h40
  text "50ohm CPWG / 10mils Iso - 13.72 mils" at 112,255.91 h40
  text "55ohm CPWG / 10mils Iso - 11.55 mils" at 2141,255.91 h40
Bottom Overlay:
  drawing of 588 lines, arcs and shapes, not listed
Top Solder:
  lines w3: 43.5,1377.95 3106.11,1377.95
  lines w11.28: 2564.28,4597 2564.28,4754.54 ; 2565.28,4829.5 2565.28,5144.58 ; 2600.72,4745 2600.72,4754.5 ; 2600.72,4829.5 2600.72,4837.72 cw(c2657,4837.72) 2657,4894 2685,4894 ccw(c2685,4994) 2785,4994 2785,5109 cw(c2885,5109) 2812.46,5177.83 ; 2620.5,4783.46 3106.11,4783.46
  lines w11.55: 1968.5,43.5 1968.5,204.88 cw(c2551.02,204.88) 2551.02,787.4 3109.1,787.4
  lines w13.72: 13,2165.35 2215.55,2165.35 ; 43.34,4784.25 354.25,4784.25 ; 43.5,787.4 598.28,787.4 cw(c598.28,204.58) 1181.1,204.58 1181.1,43.5 ; 43.5,2952.76 2156.5,2952.76 ; 43.5,3740.16 2172.71,3740.16 ; 2313,5860.16 3106.11,5860.16
  lines w97.14: 355,4785.33 761,4785.33 ; 2177.17,2952.76 3080.71,2952.76 ; 2215.55,2165.35 3080.71,2165.35
Board Outline:
  the board outline again, w10